# Altium PCB B303AA.PcbDoc
Units mm, origin at the board's own origin, x right, y up, seen from the top; angles counter-clockwise.
Board outline 10 x 29.99 mm, 4 copper layers (Top Layer, Power-1, Power-2, Bottom Layer), stack 1.619 mm thick; 6 components, 4 nets, 20 pads, 2 vias.
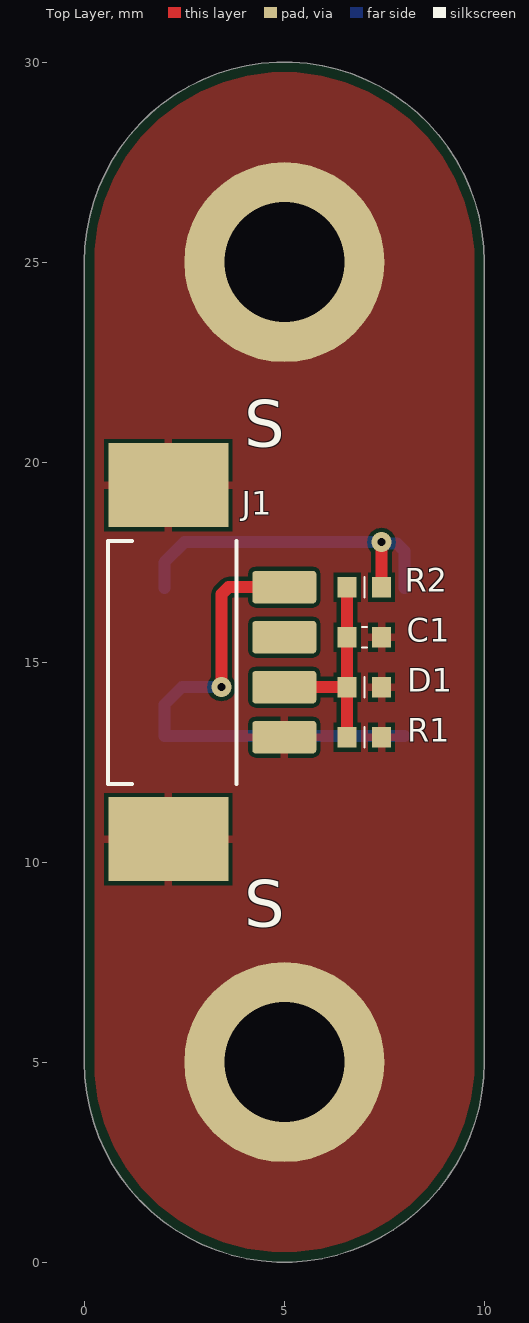
[diagram p0: Top Layer view]
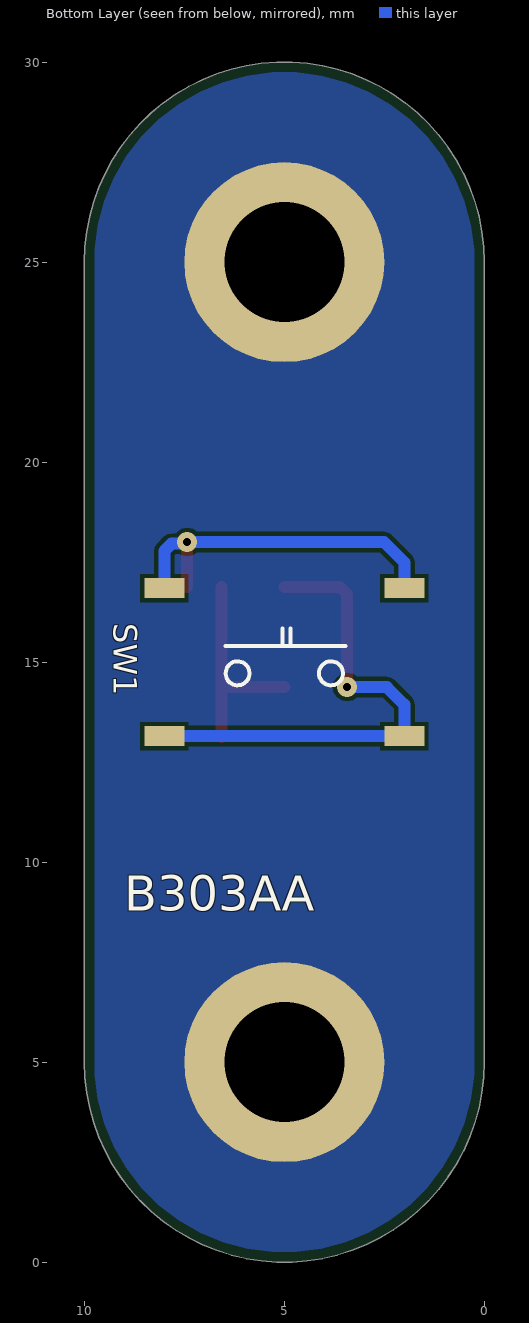
[diagram p1: Bottom Layer view, seen from below]
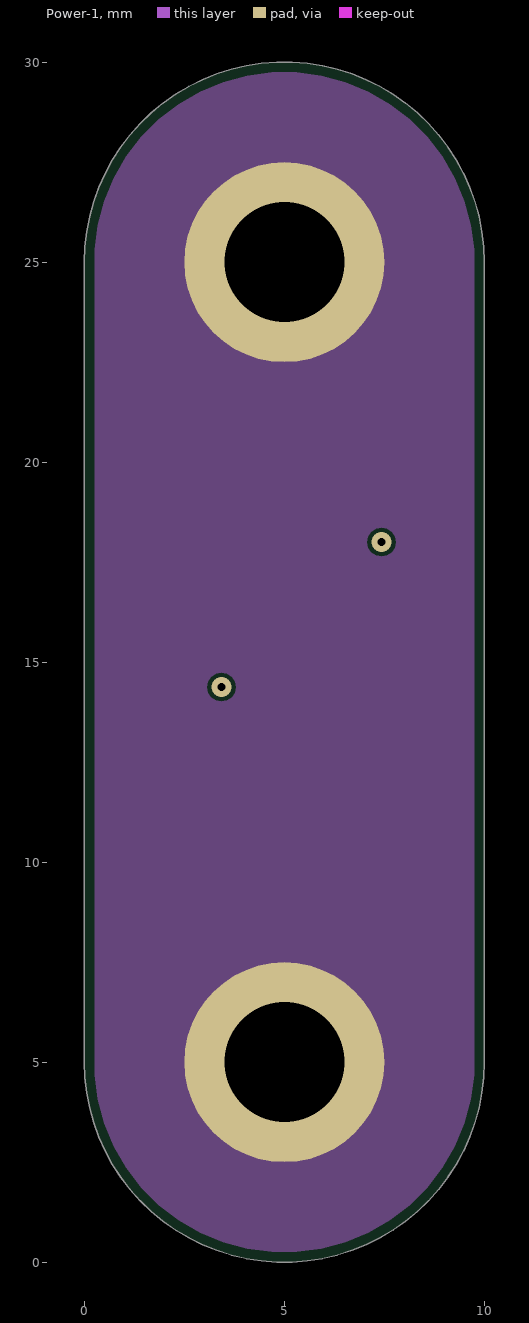
[diagram p2: Power-1]
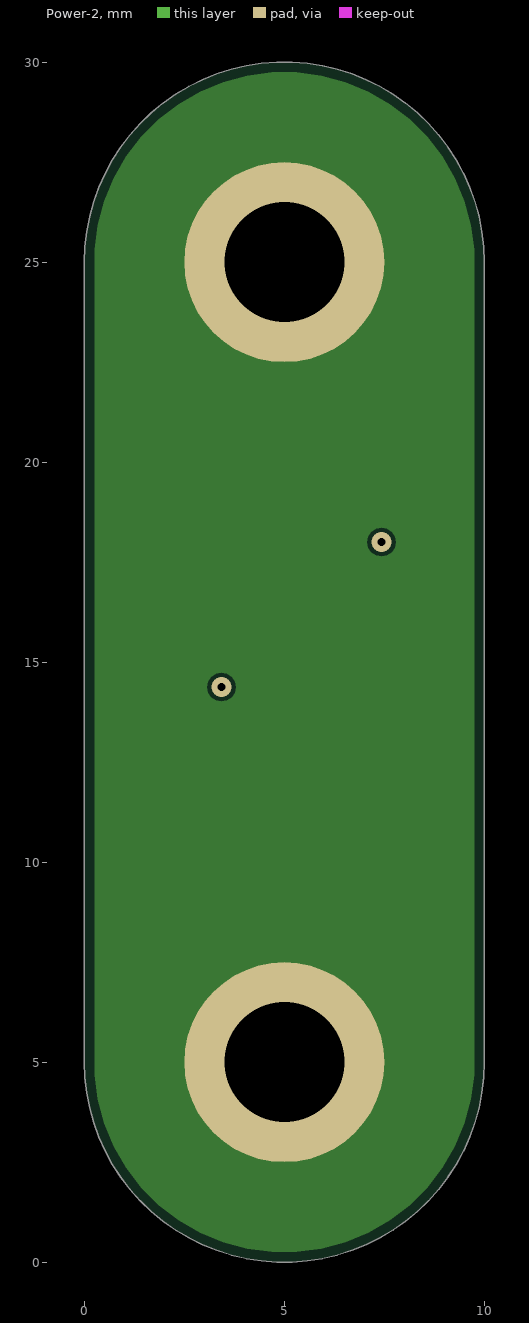
[diagram p3: Power-2]
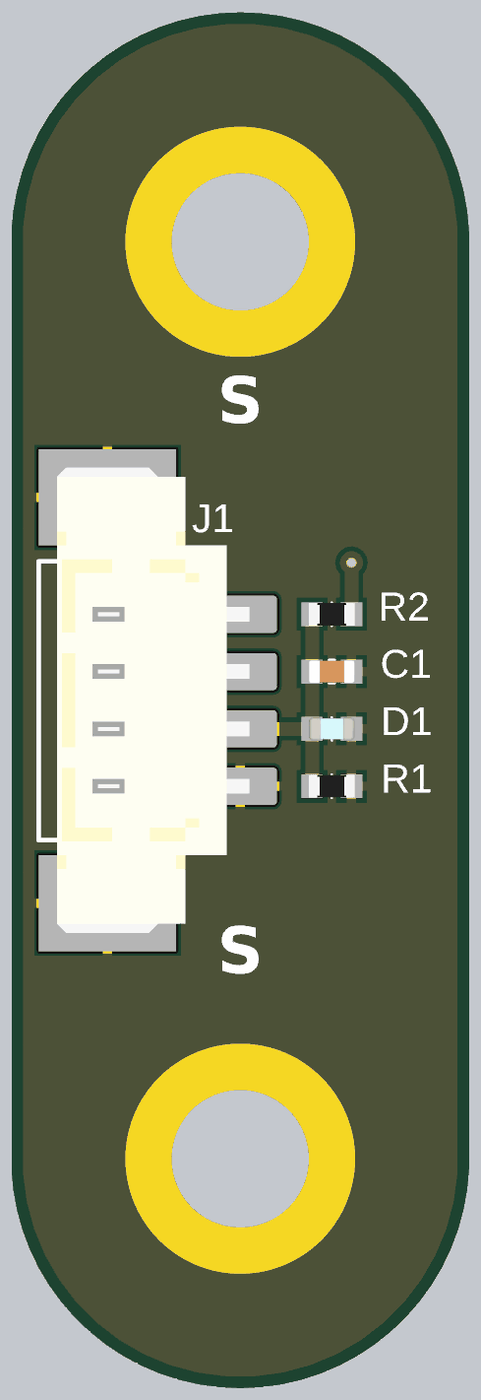
[diagram p4: 3D render of the assembled board from above, using the file's embedded part models]

## Layer stack, top to bottom
Top Solder: solder mask 0.0254, SM-001, Dk 4
Top Layer: signal copper 0.035
Dielectric 1: prepreg 0.2083, PP-022, Dk 4.5
Power-1: signal copper 0.071
Dielectric 3: core 0.9906, Core-042, Dk 4.6
Power-2: signal copper 0.071
Dielectric 5: prepreg 0.2083, PP-022, Dk 4.5
Bottom Layer: signal copper 0.035
Bottom Solder: solder mask 0.0254, SM-001, Dk 4

## Board outline
0,5 0,25 cw(c5,25) 10,25 10,5 cw(c5,5)

## Design rules (kind name [scope] priority, off if disabled: settings)
BoardOutlineClearance [All] p1: gap=0.25 ignorepadtopadclearanceinfootprint=FALSE except(0: Arc-SplitContinuation Track-SplitContinuation SMDPad-SplitContinuation THPad-SplitContinuation Via-SplitContinuation Fill-SplitContinuation Poly-SplitContinuation Region-SplitContinuation Text-SplitContinuation)
Clearance Clearance-xPP-xTP-xTT [All] p1: gap=0.1 ignorepadtopadclearanceinfootprint=FALSE except(0: Arc-Hole Track-Hole SMDPad-Hole THPad-Hole Via-Hole Fill-Hole Poly-Hole Region-Hole Text-Hole)
ComponentClearance [All] p1: gap=0.25 collisioncheckmode=3 verticalgap=0.25 showdistances=FALSE
DiffPairsRouting [All] p1: maxlimit=0.25 minlimit=0.25 mostfreqgap=0.25 toplayer_minwidth=0.381 toplayer_maxwidth=0.381 toplayer_prefwidth=0.381 midlayer1_minwidth=0.381 midlayer1_maxwidth=0.381 midlayer1_prefwidth=0.381 midlayer2_minwidth=0.381 midlayer2_maxwidth=0.381 midlayer2_prefwidth=0.381 bottomlayer_minwidth=0.381 bottomlayer_maxwidth=0.381 bottomlayer_prefwidth=0.381 maxuncoupledlength=12.5
Height [All] p1: minheight=0 maxheight=25 prefheight=12.5
HoleSize HoleSize-PTH [All] p1: absolutevalues=TRUE maxlimit=5 minlimit=0.15 maxpercent=80.000 minpercent=20.000
HoleToHoleClearance [All] p1: gap=0.35 allowstackedmicrovias=TRUE
MinimumAnnularRing "Minimum IAR  <= 0.45mm" [((ObjectKind = 'Pad') OR (ObjectKind = 'Via')) And (Layer = 'MultiLayer') And (HoleDiameter <= AsMM(0.45))] p1: minimumring=0.125 // minimum inner annular ring for pads <= 0.45mm finished hole size
MinimumAnnularRing "Minimum IAR  > 0.45mm" [((ObjectKind = 'Pad') OR (ObjectKind = 'Via')) And (Layer = 'MultiLayer') And (HoleDiameter > AsMM(0.45))] p2: minimumring=0.125 // minimum inner annular ring for pads > 0.45mm finished hole size
MinimumAnnularRing Minimum-IAR [All] p3: minimumring=0.125
MinimumSolderMaskSliver [All] p1: minsoldermaskwidth=0.08
PlaneClearance [InNet('ANT_GSM')] p1: clearance=0.05
PlaneClearance PlaneClearance-IPI [All] p2: clearance=0.25
PlaneConnect [All] p1: planeconnectstyle=Relief reliefexpansion=0.175 reliefentries=4 reliefconductorwidth=0.2 reliefairgap=0.1
PolygonConnect PolygonConnect_Via [All vs (ObjectKind = 'Via') And (HoleDiameter <= AsMM(0.45))] p1: connectstyle=Direct reliefconductorwidth=0.254 reliefentries=4 polygonreliefangle="90 Angle" airgapwidth=0.254
PolygonConnect PolygonConnect-xTW [All] p2: connectstyle=Relief reliefconductorwidth=0.2 reliefentries=4 polygonreliefangle="90 Angle" airgapwidth=0.1
RoutingCorners [All] p1: cornerstyle=45-Degree minsetback=2.5 maxsetback=2.5
RoutingVias "RoutingVias <= 0.45mm" [(ObjectKind = 'Via') And (HoleDiameter <= AsMM(0.45))] p1: holewidth=0.2 width=0.55 viastyle="Through Hole" minholewidth=0.15 minwidth=0.5 maxholewidth=0.45 maxwidth=0.8
RoutingVias "RoutingVias > 0.45mm" [(ObjectKind = 'Via') And (HoleDiameter > AsMM(0.45))] p2: holewidth=0.5 width=0.85 viastyle="Through Hole" minholewidth=0.5 minwidth=0.85 maxholewidth=0.9 maxwidth=1.25
SilkToSilkClearance [All] p1: silktosilkclearance=0.2
SilkToSolderMaskClearance SilkscreenOverComponentPads [IsPad] p1: minsilkscreentomaskgap=0.1 clearancetoexposedcopper=TRUE
SolderMaskExpansion SolderMaskExpansion_Via [(ObjectKind = 'Via') And (HoleDiameter <= AsMM(0.45))] p1: expansion=0.01 istentingtop=TRUE soldermaskfromhole=TRUE
SolderMaskExpansion [All] p2: expansion=0.01 istentingtop=FALSE
UnRoutedNet [All] p1: checkbadconnections=TRUE
Width Width-xTW [All] p1: maxlimit=1.5 minlimit=0.1 preferedwidth=0.2
18 further rules are at their usual default settings.

## Components (designator, comment, footprint, x,y, rotation, side; value= is the part's Value field where it differs from the comment)
C1 "Multilayer Ceramic Capacitor" CAPACITOR_0402 7,15.625 r180 top value=33pF
D1 "ESD Suppressors" ESD_0402 7,14.375 r180 top
J1 "4P SMD Tunic Connector" "Connector_Tunic 4P - H" 4,15 r270 top
R1 "Thick Film Resistor" RESISTOR_0402 7,13.125 r180 top value=47K
R2 "Thick Film Resistor" RESISTOR_0402 7,16.875 r180 top value=10K
SW1 "Tactile Switches" PTS526_Switch 5,15 r180 bottom

## Footprints (in the part's own frame and the unit in brackets; to place one, negate y for a bottom-side part, rotate by r counter-clockwise, add the part's x,y. Pads: shape width x height; smd on the part's side, far side on the other; paste and mask are expansions set on the pad)
CAPACITOR_0402 [mm] "Chip Capacitor, IPC High Density"
  rect 0.47x0.52 smd: 1(-0.43,0) 2(0.43,0)
  silkscreen extent -0.06,-0.25 0.06,0.25, body extent -0.5,-0.25 0.5,0.25, height 0.49
"Connector_Tunic 4P - H" [mm] "4P Tunic Connector"
  rrect20% 0.81x1.6 smd mask+0.05: 1(-1.875,1) 2(-0.625,1) 3(0.625,1) 4(1.875,1)
  rect 2.1x3 smd mask+0.05: 5(-4.425,-1.9) 6(4.425,-1.9)
  silkscreen extent -3.03,-3.4 3.05,-0.2, body extent -5.08,-3 5.07,1.2, height 4.7
ESD_0402 [mm] "ESD, IPC High Density"
  rect 0.47x0.52 smd: 1(-0.43,0) 2(0.43,0)
  silkscreen extent 0,-0.25 0,0.25, body extent -0.5,-0.25 0.5,0.25, height 0.44
PTS526_Switch [mm] "Tactile Swittch"
  rect 1x0.5 smd: 1(-3,1.85) 1(3,1.85) 2(-3,-1.85) 2(3,-1.85)
  silkscreen extent -1.47,-0.58 1.53,0.84, body extent -3.25,-2.54 3.25,2.54, height 1.52
RESISTOR_0402 [mm] "Chip Resistor, IPC High Density"
  rect 0.47x0.52 smd: 1(-0.43,0) 2(0.43,0)
  silkscreen extent 0,-0.25 0,0.25, body extent -0.5,-0.25 0.5,0.25, height 0.35

## Part data
C1: library part "Capacitor - 33pF [0402-6V3]", "Capacitor - 33pF [0402] (Ceramic)", Case=0402, Dielectric=X7R, Manufacturer_Name=Kemet, Manufacturer_Part_Number=C0402C330J9RACAUTO, Maximum Operating Temperature=+125, Minimum Operating Temperature=-55, Supplier Part Number 1=80-C0402C330J9RAUTO, Tolerance=10%, Voltage=6V3, ComponentLink1Description=DataSheet, ComponentLink1URL=https://api.kemet.com/component-edge/download/datasheet/C0402C330J9RACAUTO.pdf, ComponentLink2Description=Mouser, ComponentLink2URL=https://www.mouser.com/Search/Refine.aspx?Keyword=80-C0402C330J9RAUTO, Height=0.5mm, Mouser_Part_Number=80-C0402C330J9RAUTO, ROHS=Yes, Supplier 1=Mouser
D1: library part "Diode - ESD Protection", "TVS Diode (Bi-directional)", Case=0402, Clamping Voltage=35V, Diode Capacitance=0.05pF, Manufacturer_Name="Bussmann / Eaton", Manufacturer_Part_Number=0402ESDA-MLP1, Maximum Operating Temperature=+125, Minimum Operating Temperature=-55, Supplier Part Number 1=504-0402ESDA-MLP1, Voltage ESD Air Gap=15kV, Voltage ESD Contact=8kV, Working Voltage=30V, ComponentLink1Description=DataSheet, ComponentLink1URL=https://www.mouser.com.tr/datasheet/2/87/47c59e11-d058-4882-bc35-d8572f2ca054-38826.pdf, ComponentLink2Description=Mouser, ComponentLink2URL=https://www.mouser.com.tr/ProductDetail/Bussmann-Eaton/0402ESDA-MLP1?qs=%2Fha2pyFadughxyc7TyLWeW%2FUvipVY6Ex3naV%2FjpO3plZBZWDLqV4bw%3D%3D, Height=0.436mm, Mouser_Part_Number=504-0402ESDA-MLP1, Polarity=Bidirectional, ROHS=Yes, Supplier 1=Mouser, Supplier 2=Digi-Key, Supplier Part Number 2=283-2964-1-ND
J1: library part "Connector - Mini Tunic 4P (1.25)", "Mini Tunic Connector with 4P", Case=SMD, Manufacturer_Name=Molex, Manufacturer_Part_Number=53261-0471, Supplier Part Number 1=538-53261-0471, ComponentLink1Description=DataSheet, ComponentLink1URL=https://www.mouser.com.tr/datasheet/2/276/0532610471_PCB_HEADERS-170942.pdf, ComponentLink2Description=Mouser, ComponentLink2URL=https://www.mouser.com.tr/ProductDetail/Molex/53261-0471?qs=%2Fha2pyFaduhLhIsk8tywtK7BwWtguBSP4XxyDBTOTfs%3D, Mouser_Part_Number=538-53261-0471, Pitch=1.25mm, Position=4, ROHS=Yes, Supplier 1=Mouser, Supplier 2=Digi-Key, Supplier Part Number 2=WM7622CT-ND, System=Connector
R1: library part "Resistor - 47K", "Thick Film Resistors - SMD 1/16 W 47 Kohms 1%", Case=0402, Manufacturer_Name=Vishay, Manufacturer_Part_Number=CRCW040247K0FKED, Supplier Part Number 1=71-CRCW040247K0FKEDH, Tolerance=%1, ComponentLink1Description=DataSheet, ComponentLink1URL=https://www.mouser.com.tr/datasheet/2/427/dcrcwe3-1762152.pdf, ComponentLink2Description=Mouser, ComponentLink2URL=https://www.mouser.com.tr/ProductDetail/Vishay-Dale/CRCW040247K0FKED?qs=sGAEpiMZZMu61qfTUdNhG2DpbjADlD3GL%252B3h1elTxqU%3D, Height=0.4mm, Mouser_Part_Number=71-CRCW0402-47K-E3, Supplier 1=Mouser, Supplier 2=Digi-Key, Supplier Part Number 2=541-47.0KYCT-ND
R2: library part "Resistor - 10K", "Thick Film Resistors - SMD 1/16 W 10 Kohms 1%", Case=0402, Manufacturer_Name=Vishay, Manufacturer_Part_Number=CRCW040210K0FKED, Supplier Part Number 1=71-CRCW040210K0FKEDH, Tolerance=%1, ComponentLink1Description=DataSheet, ComponentLink1URL=https://www.mouser.com.tr/datasheet/2/427/dcrcwe3-1762152.pdf, ComponentLink2Description=Mouser, ComponentLink2URL=https://www.mouser.com.tr/ProductDetail/Vishay-Dale/CRCW040210K0FKED?qs=sGAEpiMZZMu61qfTUdNhG2DpbjADlD3GcalbOv9utCY%3D, Height=0.4mm, Mouser_Part_Number=71-CRCW0402-10K-E3, Supplier 1=Mouser, Supplier 2=Digi-Key, Supplier Part Number 2=541-10.0KYCT-ND
SW1: library part "Switch - Tactile (SMD)", "Tactile Switches 50mA 12VDC, 5.2x5.2mm, 0.8mm H, 260gf, G leads.", Manufacturer_Name="C&K Switches", Manufacturer_Part_Number="PTS526 SK08 SMTR2 LFS", Supplier Part Number 1=PTS526SK08SMTR2LFS-REEL, ComponentLink1Description=DataSheet, ComponentLink1URL=https://eu.mouser.com/datasheet/2/60/pts526-1651200.pdf, ComponentLink2Description=Mouser, ComponentLink2URL=https://eu.mouser.com/ProductDetail/CK/PTS526-SK08-SMTR2-LFS?qs=sGAEpiMZZMsgGjVA3toVBL%2FRce%252ByN3s1hQPqiLlQ%252BeM%3D, Height=0.8mm, Mouser_Part_Number=611-PTS526SK08SMTR2L, Supplier 1="Future Electronics", Supplier 2=Mouser, Supplier 3=Arrow, Supplier 4=Digi-Key, Supplier Part Number 2=611-PTS526SK08SMTR2L, Supplier Part Number 3="PTS526 SK08 SMTR2 LFS", Supplier Part Number 4=CKN12219-1-ND

## Free pads (board coordinates)
  round 5 hole 3: 2(5,5) 2(5,25)

## Via types
v1: diameter 0.5, hole 0.2, Top Layer to Bottom Layer, tented both sides, 2 vias

## Nets (pads, with @x,y where several pads share a name; then routed paths per layer and width w, separated by ;. In a path a pad name is that pad's centre, name@x,y a point inside that pad or via, vN(x,y) a via of type N, cw(c..) or ccw(c..) an arc to the next point about the centre after c; other vN are vias at no path point)
BAT+: J1.1 SW1.2 | length 12.4
  Top Layer w0.3: v1(3.429,14.375) 3.429,16.699 3.605,16.875 J1.1
  Bottom Layer w0.3: v1(3.429,14.375) 2.437,14.375 2,13.938 2,13.15 SW1.2@8,13.15
GND: C1.1 D1.1 J1.4 J1.5 J1.6 pad.2 R1.1
NetC1_2: C1.2 D1.2 J1.3 R1.2 R2.2 | length 5.3
  Top Layer w0.3: J1.3 D1.2 ; R1.2 D1.2 ; R2.2 C1.2 D1.2
NetR2_1: R2.1 SW1.1 | length 9
  Top Layer w0.3: R2.1 v1(7.43,18)
  Bottom Layer w0.3: SW1.1@2,16.85 2,17.494 2.506,18 v1(7.43,18) 7.468,17.962 7.819,17.962 8.001,17.78 8.001,16.851 SW1.1@8,16.85
pads on no net: J1.2

## Polygon pours and split planes (outlines as drawn)
GND on Power-2 "Top Layer-No Net1" (solid, pour order 1): 0,5 0,25 cw(c5,25) 10,25 10,5 cw(c5,5)
GND on Power-1 "Power-2-No Net" (solid, pour order 2): 0,5 0,25 cw(c5,25) 10,25 10,5 cw(c5,5)
GND on Bottom Layer "Power-1-No Net" (solid, pour order 3): 0,5 0,25 cw(c5,25) 10,25 10,5 cw(c5,5)
GND on Top Layer "Top Layer-No Net" (solid, pour order 0): 0,5 0,25 cw(c5,25) 10,25 10,5 cw(c5,5)

## Silkscreen, mask and mechanical layers (free items; w line width, h text height)
Top Overlay:
  text "S" at 4,20 h2
  text "S" at 4,8 h2
Bottom Overlay:
  text "B303AA" at 9,8.5 h1.5
Bottom Solder:
  region: 1402 vertices and 36 holes, not listed, extent 3.533,18.883 7.084,21.386
Mechanical 1:
  the board outline again, w0.254